# Altium PCB RV09-S_PCB.PcbDoc
Units mm, origin at the board's own origin, x right, y up, seen from the top; angles counter-clockwise.
Board outline 18.5 x 44.9 mm, 2 copper layers (Top Layer, Bottom Layer), stack 1.571 mm thick; 8 components, 6 nets, 29 pads, 2 vias.
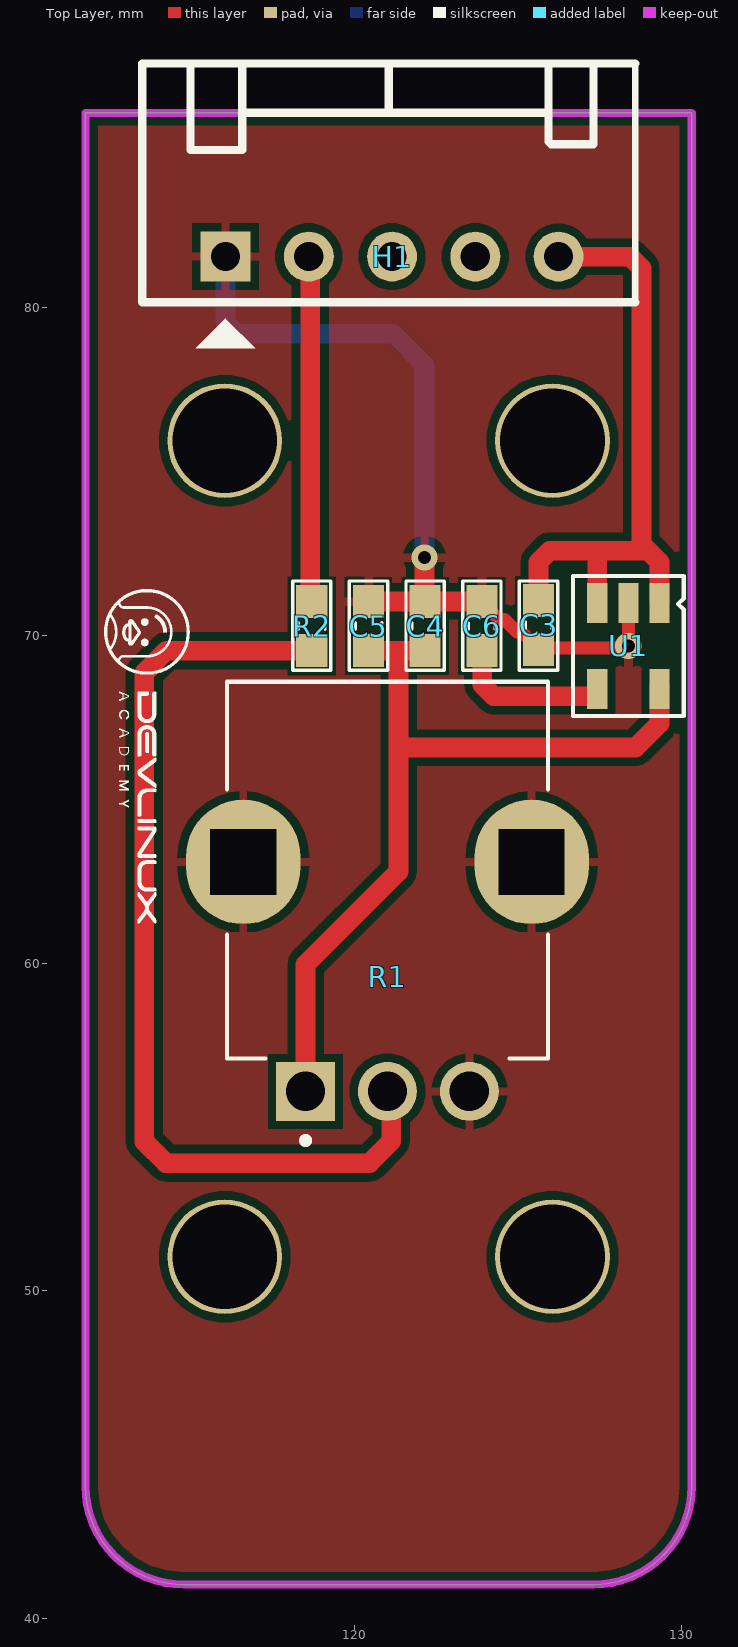
[diagram p0: Top Layer view]
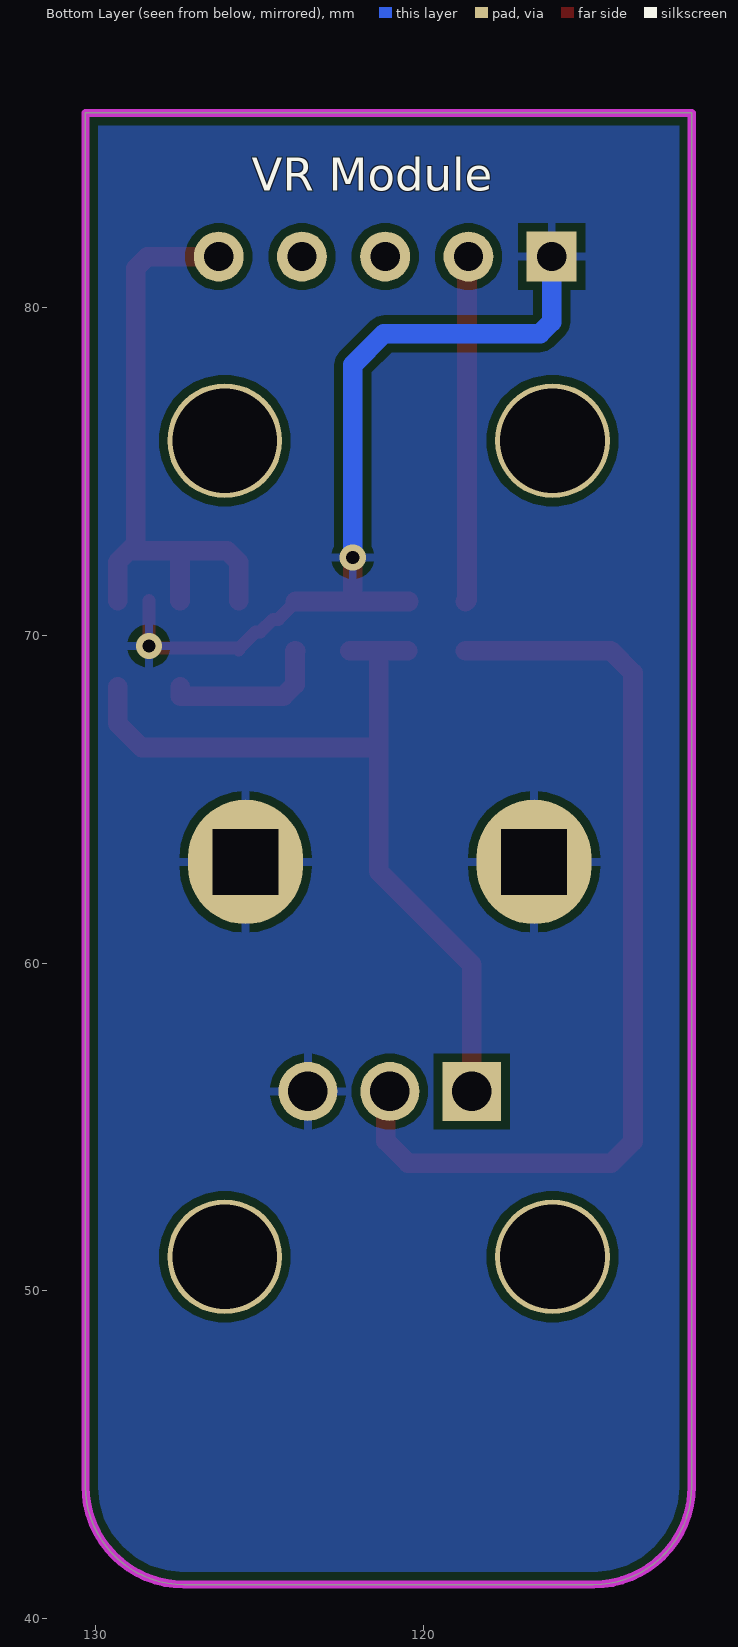
[diagram p1: Bottom Layer view, seen from below]
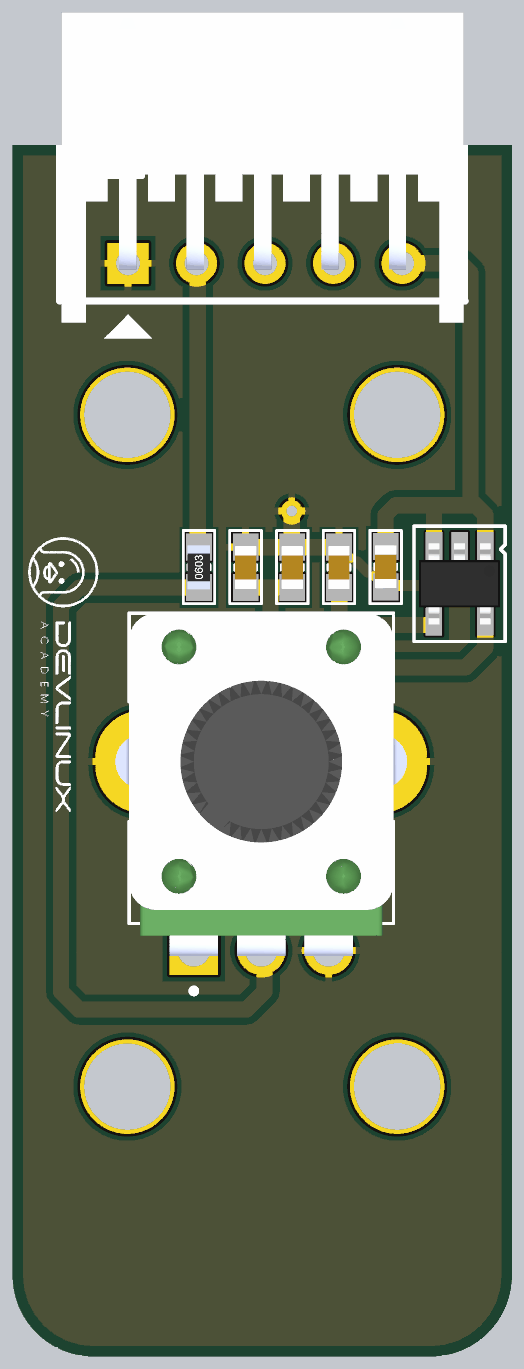
[diagram p2: 3D render of the assembled board from above, using the file's embedded part models]

## Layer stack, top to bottom
Top Solder: solder mask 0.0102, Solder Resist, Dk 3.5
Top Layer: signal copper 0.0356
Dielectric 1: dielectric 1.5, FR-4, Dk 4.8
Bottom Layer: signal copper 0.0356
Bottom Solder: solder mask 0.0102, Solder Resist, Dk 3.5

## Board outline
111.806,44.043 111.806,85.943 130.306,85.943 130.306,44.043 cw(c127.306,44.043) 127.306,41.043 114.806,41.043 cw(c114.806,44.043)

## Design rules (kind name [scope] priority, off if disabled: settings)
Clearance [All] p1: gap=0.254 ignorepadtopadclearanceinfootprint=FALSE except(0: Arc-Hole Track-Hole SMDPad-Hole THPad-Hole Via-Hole Fill-Hole Poly-Hole Region-Hole Text-Hole)
PolygonConnect [All] p1: connectstyle=Relief reliefconductorwidth=0.254 reliefentries=4 polygonreliefangle="90 Angle" airgapwidth=0.254
RoomDefinition RV09-S_SCH [InComponentClass('RV09-S_SCH')] p1: confinementstyle=ConfineIn formatcopy=TRUE lockcomponents=FALSE outline 178.943,26.797 223.139,26.797 223.139,57.912 178.943,57.912
RoutingVias [All] p1: holewidth=0.4 width=0.8 viastyle="Through Hole" minholewidth=0.3 minwidth=0.6 maxholewidth=0.5 maxwidth=1
SolderMaskExpansion [All] p1: expansion=0.102 istentingtop=FALSE
Width [All] p1: maxlimit=0.6 minlimit=0.254 preferedwidth=0.4
30 further rules are at their usual default settings.

## Components (designator, comment, footprint, x,y, rotation, side; value= is the part's Value field where it differs from the comment)
C3 "100nF" "tu 0603" 125.63,70.314 r270 top
C4 "10uF" "tu 0603" 122.17,70.289 r90 top
C5 "100nF" "tu 0603" 120.44,70.289 r90 top
C6 "22nF" "tu 0603" 123.9,70.289 r90 top
H1 "5P 2.54" "Header 5P DC 2.54" 116.08,81.56 r90 top
R1 "RV09-S 10k" TRIM_RV09AF-40-20K-A10K 121.02,63.09 r0 top
R2 "1K" "tro smd 0603" 118.71,70.289 r90 top
U1 "RT9193-33GB" SOT23-5 128.37,69.68 r180 top

## Footprints (in the part's own frame and the unit in brackets; to place one, negate y for a bottom-side part, rotate by r counter-clockwise, add the part's x,y. Pads: shape width x height; smd on the part's side, far side on the other; paste and mask are expansions set on the pad)
"Header 5P DC 2.54" [mil]
  rect 60x60 hole 35: 1(0,0)
  round 60 hole 35: 2(0,-100) 3(0,-200) 4(0,-300) 5(0,-400)
  silkscreen extent -110,-492 232,100, body extent -87,-490 366,97, height 240
SOT23-5 [mm] "CASE: SOT"
  rect 0.62x1.22 smd mask+0.076: 1(-0.953,-1.31) 2(-0.003,-1.31) 3(0.947,-1.31) 4(0.952,1.31) 5(-0.953,1.31)
  silkscreen extent -1.69,-2.14 1.69,2.14, body extent -1.5,-1.5 1.5,1.5, height 1.41
TRIM_RV09AF-40-20K-A10K [mm]
  rect 1.8x1.8 / inner round 1.8 / far side rect 1.8x1.8 hole 1.2: 1(-2.5,-7)
  round 1.8 hole 1.2: 2(0,-7) 3(2.5,-7)
  oval 3.5x3.8 hole 2 square: SH1(-4.4,0) SH2(4.4,0)
  silkscreen extent -4.9,-8.6 4.9,5.5, body extent -5.7,-7.2 5.7,5.5, height 20
"tro smd 0603" [mm] "Chip Capacitor, 2-Leads, Body 1,60x0,80mm, IPC Medium Density"
  rect 1x0.95 smd mask+0.076: 1(-0.75,0) 2(0.75,0)
  silkscreen extent -1.35,-0.58 1.37,0.58, body extent -0.82,-0.42 0.82,0.43, height 0.44
"tu 0603" [mm] "Chip Capacitor, 2-Leads, Body 1,60x0,80mm, IPC Medium Density"
  rect 1x0.95 smd mask+0.076: 1(-0.75,0) 2(0.75,0)
  silkscreen extent -1.35,-0.58 1.37,0.58, body extent -0.8,-0.4 0.8,0.4, height 0.9

## Part data
C3 C5 C6: library part "Tu 0603 104 50V 10%", "Dán", Chung_Loai=Dán, Don_Vi=Con, Ma_Hang=MH004568, So_Chan=2, Ten_Linh_Kien="Tụ 0603 104-100nF 10% 50V"
C4: library part "Tu 0603 106 16V 20%", "Dán", Chung_Loai=Dán, Don_Vi=Con, Ma_Hang=MH004848, So_Chan=2, Ten_Linh_Kien="Tụ 0603-10uF 20% 16V"
H1: library part "Header 5P 2.54 Duc Cong", "Cắm", Chung_Loai=Cắm, Don_Vi=Con, Ma_Hang=MH001308, Ten_Linh_Kien="Header 5P XH2.54-5P Đực Cong"
R1: Package=None, Check_prices=https://www.snapeda.com/parts/RV09AF-40-20K-A10K/Alpha/view-part/?ref=eda, MF="Alpha Taiwan", MP=RV09AF-40-20K-A10K, SnapEDA_Link=https://www.snapeda.com/parts/RV09AF-40-20K-A10K/Alpha/view-part/?ref=snap
R2: library part "Tro 0603 1% 10k", "Dán", Chung_Loai=Dán, Don_Vi=Con, Ma_Hang=MH006333, So_Chan=2, Ten_Linh_Kien="Trở 0603 1% 10k"
U1: library part REG_5.5V-3.3V-0.3A-1W-SOT-23-5, "Linear Voltage Regulator IC 1 Output 300mA SOT-23-5", Alternate Part Number-1=NA, Case/Package=SOT-23-5, Manufacturer="Richtek USA Inc.", Supplier Part Number-1=C15651, Manufacturer Part Number=RT9193-33GB, Supplier-1=LCSC

## Free pads (board coordinates)
  round 3.5 hole 3.2: 7(116.056,51.043) 7(116.056,75.943) 7(126.056,75.943) 7(126.056,51.043)

## Via types
v1: diameter 0.8, hole 0.4, Top Layer to Bottom Layer, 2 vias

## Nets (pads, with @x,y where several pads share a name; then routed paths per layer and width w, separated by ;. In a path a pad name is that pad's centre, name@x,y a point inside that pad or via, vN(x,y) a via of type N, cw(c..) or ccw(c..) an arc to the next point about the centre after c; other vN are vias at no path point)
+3V3: C4.1 C5.1 R1.1 U1.5 | length 25.8
  Top Layer w0.6: R1.1 118.52,59.96 121.357,62.797 121.357,66.58 ; C5.1@120.475,69.539 121.357,69.539 ; C4.1@122.24,69.539 121.357,69.539 ; U1.5@129.323,68.44 129.323,67.313 128.59,66.58 121.357,66.58 ; 121.357,66.58 121.357,69.539
+5: C3.1 H1.5 U1.1 U1.3 | length 19.2
  Top Layer w0.6: C3.1 125.63,72.239 125.981,72.59 127.714,72.59 128.971,72.59 ; H1.5 128.419,81.56 128.77,81.209 128.77,72.791 128.971,72.59 ; U1.3@127.423,71.06 127.423,72.59 ; U1.1@129.323,71.06 129.323,72.239 128.971,72.59
A_OUT: H1.2 R2.2 | length 10.6
  Top Layer w0.6: H1.2 118.665,81.515 118.665,71.084 R2.2
GND: C3.2 C4.2 C5.2 C6.2 H1.1 R1.3 R1.SH1 R1.SH2 U1.2 | length 25.8
  Top Layer w0.4: C6.2 123.9,71.014 124.421,70.493 124.584,70.493 124.967,70.11 125.109,70.11 125.63,69.589 C3.2 125.688,69.622 128.312,69.622 128.371,69.681 128.371,71.059 U1.2@128.373,71.06
  Top Layer w0.6: C5.2 C4.2 ; v1(122.15,72.38) 122.15,71.059 C4.2 ; C6.2 C4.2
  Bottom Layer w0.6: H1.1 116.08,79.561 116.431,79.21 121.2,79.21 122.15,78.26 v1(122.15,72.38)
  other v1: 128.37,69.68
NetC6_1: C6.1 U1.4 | length 5
  Top Layer w0.6: C6.1 123.911,69.528 123.911,68.501 124.262,68.15 127.408,68.15 127.418,68.16 U1.4@127.418,68.44
NetR1_2: R1.2 R2.1 | length 29.4
  Top Layer w0.6: R2.1 114.279,69.539 113.6,68.86 113.6,54.56 114.26,53.9 120.47,53.9 121.14,54.57 121.14,55.97 R1.2
pads on no net: H1.3 H1.4

## Polygon pours and split planes (outlines as drawn)
GND on Bottom Layer "GND_L02_P000" (solid, pour order 0): 111.806,85.943 130.306,85.943 130.306,72.14 130.306,41.043 111.798,41.043 111.798,72.14
GND on Top Layer "GND_L01_P001" (solid, pour order 1): 111.806,85.943 130.306,85.943 130.306,72.14 130.306,41.043 111.814,41.043 111.814,72.14

## Keep-outs
Keep-Out Layer:
  lines w0.254: 111.806,44.043 ccw(c114.806,44.043) 114.806,41.043 127.306,41.043 ccw(c127.306,44.043) 130.306,44.043 130.306,54.843 130.306,72.143 130.306,85.943 111.806,85.943 111.806,72.143 111.806,54.843 111.806,44.043

## Silkscreen, mask and mechanical layers (free items; w line width, h text height)
Top Overlay:
  drawing of 21 lines, arcs and shapes, not listed
Bottom Overlay:
  text "VR Module" at 125.23,83.57 h1